# Altium PCB Sweep.PcbDoc
Units mil, origin at the board's own origin, x right, y up, seen from the top; angles counter-clockwise.
Board outline 3937.01 x 1968.5 mil, 2 copper layers (Top Layer, Bottom Layer); 25 components, 49 nets, 100 pads, 1 vias.
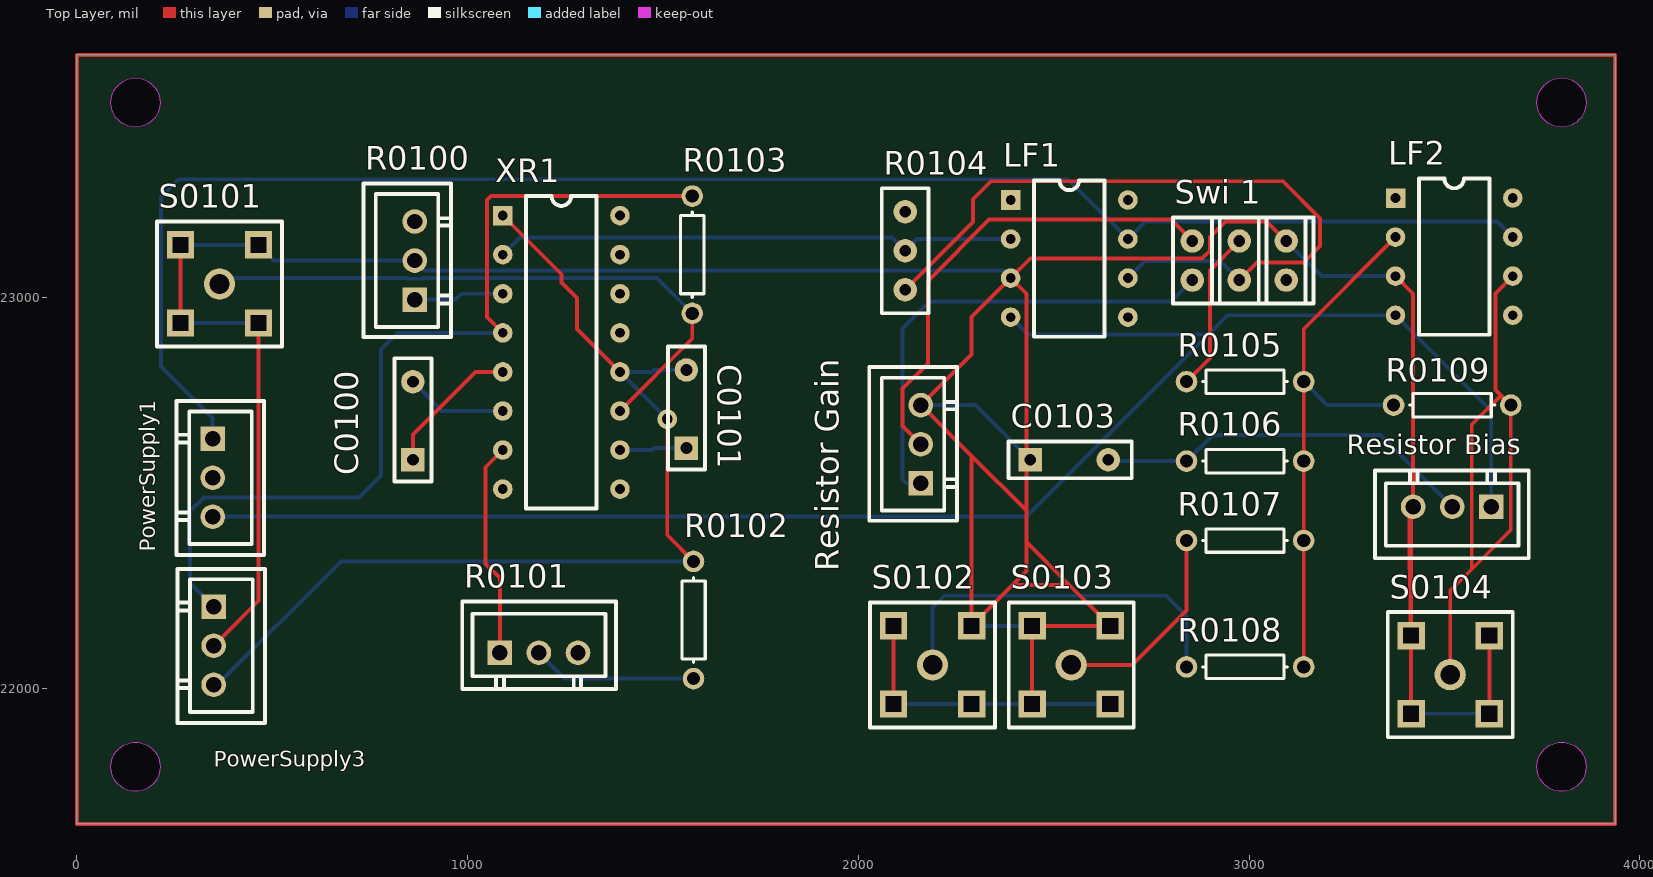
[diagram p0: Top Layer view]
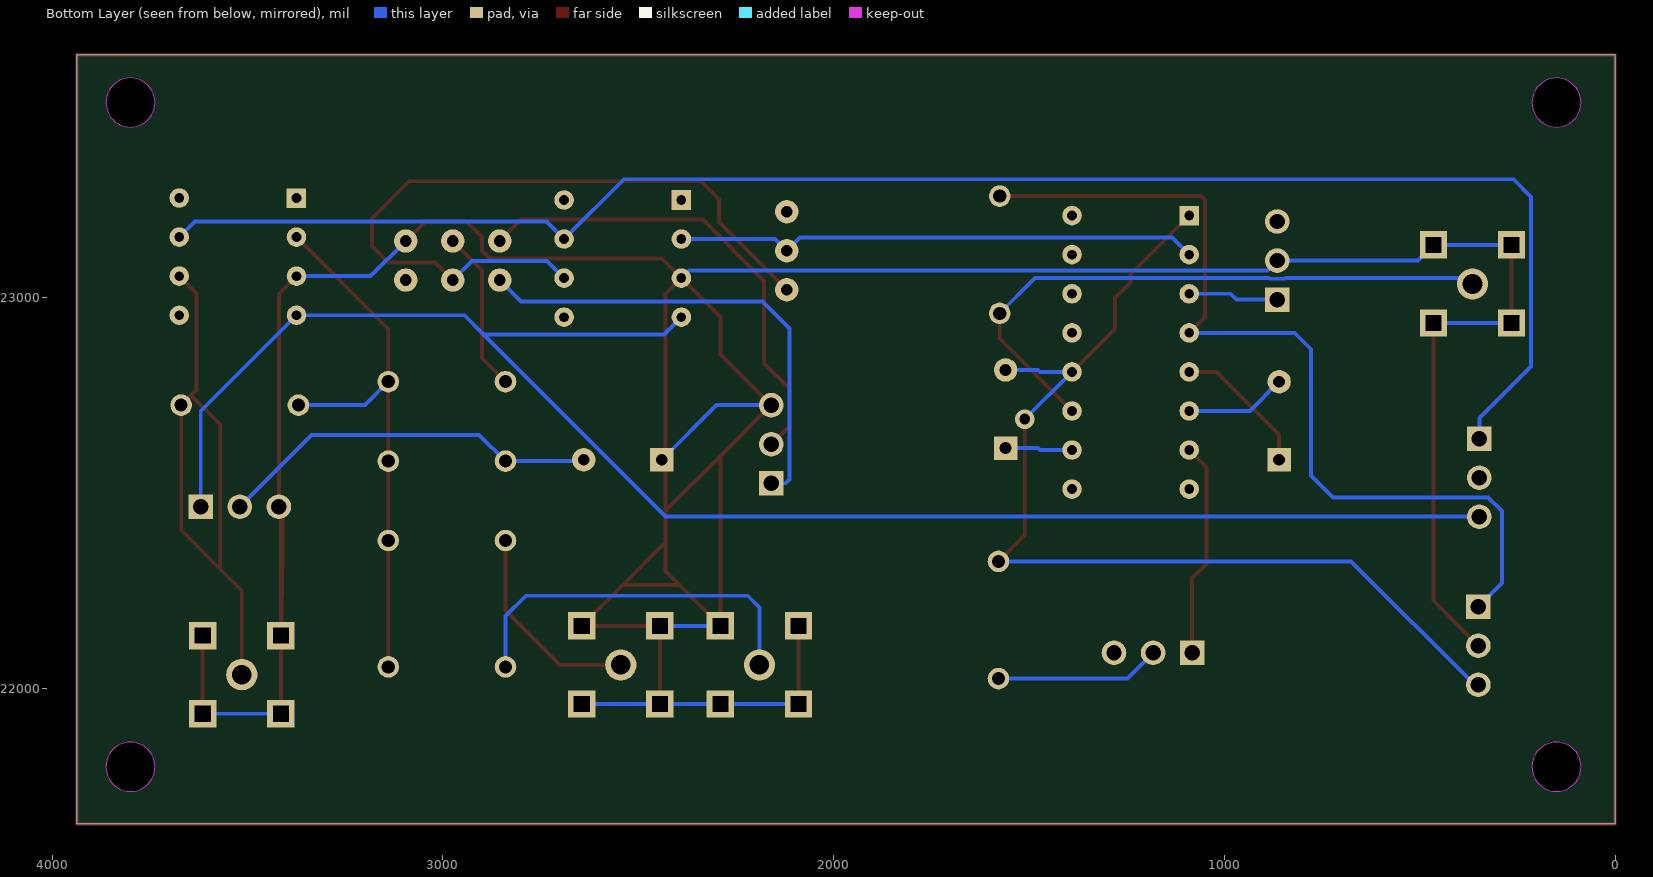
[diagram p1: Bottom Layer view, seen from below]

## Layer stack, top to bottom
Top Solder: solder mask 0.4, Solder Resist, Dk 3.5
Top Layer: signal copper 1.4
Dielectric 1: dielectric 12.6, FR-4, Dk 4.8
Bottom Layer: signal copper 1.4
Bottom Solder: solder mask 0.4, Solder Resist, Dk 3.5

## Board outline
0,21653.54 3937.01,21653.54 3937.01,23622.05 0,23622.05
cut-out: 3800,21737.01 cw(c3800,21800) 3737.01,21800 cw(c3800,21800) 3800,21862.99 cw(c3800,21800) 3862.99,21800 cw(c3800,21800)
cut-out: 3800,23437.01 cw(c3800,23500) 3737.01,23500 cw(c3800,23500) 3800,23562.99 cw(c3800,23500) 3862.99,23500 cw(c3800,23500)
cut-out: 150,23437.01 cw(c150,23500) 87.01,23500 cw(c150,23500) 150,23562.99 cw(c150,23500) 212.99,23500 cw(c150,23500)
cut-out: 150,21737.01 cw(c150,21800) 87.01,21800 cw(c150,21800) 150,21862.99 cw(c150,21800) 212.99,21800 cw(c150,21800)

## Design rules (kind name [scope] priority, off if disabled: settings)
Clearance [All] p1: gap=10 ignorepadtopadclearanceinfootprint=FALSE
PolygonConnect [All] p1: thpad.connectstyle=Relief thpad.reliefconductorwidth=10 thpad.reliefentries=4 thpad.polygonreliefangle="90 Angle" thpad.airgapwidth=10 smdpad.connectstyle=Direct smdpad.reliefconductorwidth=10 smdpad.reliefentries=4 smdpad.polygonreliefangle="90 Angle" smdpad.airgapwidth=10 via.connectstyle=Direct via.reliefconductorwidth=10 via.reliefentries=4 via.polygonreliefangle="90 Angle" via.airgapwidth=10
RoutingVias [All] p1: holewidth=28 width=50 viastyle="Through Hole" minholewidth=28 minwidth=50 maxholewidth=28 maxwidth=50
SolderMaskExpansion [All] p1: expansion=4
Width [All] p1: maxlimit=10 minlimit=10 preferedwidth=10
30 further rules are at their usual default settings.

## Components (designator, comment, footprint, x,y, rotation, side; value= is the part's Value field where it differs from the comment)
C0100 "1uF" Capacitor 860,22585.67 r90 top
C0101 "1uF" Capacitor 1560,22615.67 r90 top
C0103 "1uF" Capacitor 2440,22585.67 r0 top
LF1 "LF356N" DIP8 2390,23250.67 r0 top
LF2 "LF356N" DIP8 3375,23255.67 r0 top
PowerSupply1 "J-3" J3 347.51,22639.82 r270 top
PowerSupply3 "J-3" J3 350.01,22210 r270 top
R0100 "1K" J3 864.99,22995.67 r90 top
R0101 "1K" J3 1082.48,22091.62 r0 top
R0102 "Res1" AXIAL-0.3 1578.31,22175.67 r90 top value=1K
R0103 "Res1" AXIAL-0.3 1575,23110.67 r90 top value=10k
R0104 "1K" "Res Adj 2" 2120,23020.67 r90 top
R0105 "Res1" AXIAL-0.3 2990,22785.67 r0 top value=10K
R0106 "Res1" AXIAL-0.3 2990,22582.34 r0 top value=10K
R0107 "Res1" AXIAL-0.3 2990,22379 r0 top value=10K
R0108 "Res1" AXIAL-0.3 2990,22055.67 r0 top value=10K
R0109 "Res1" AXIAL-0.3 3520,22725.67 r0 top value=10K
"Resistor Bias" "J-3" J3 3620,22465.67 r180 top
"Resistor Gain" "J-3" J3 2160,22525.67 r90 top
S0101 "Square Wave Out" SMA-S 265,23135.67 r0 top
S0102 "Error Signal" SMA-S 2090,22160.67 r0 top
S0103 "Mod in" SMA-S 2445,22160.67 r0 top
S0104 "Current / PZT Out" SMA-S 3415,22135.67 r0 top
"Swi 1" "Switch 2x2" "Swi 2x2" 2855,23045.67 r90 top
XR1 "XR-2206" DIP16 1090,23210.67 r0 top

## Footprints (in the part's own frame and the unit in brackets; to place one, negate y for a bottom-side part, rotate by r counter-clockwise, add the part's x,y. Pads: shape width x height; smd on the part's side, far side on the other; paste and mask are expansions set on the pad)
AXIAL-0.3 [mm] "Axial Device, Thru-Hole; 2 Leads; 0.3 in Pin Spacing"
  round 1.4 hole 0.85: 1(-3.81,0) 2(3.81,0)
  silkscreen extent -2.77,-0.76 2.77,0.76
Capacitor [mil]
  rect 60x60 hole 30: 1(0,0)
  round 60 hole 30: 2(200,0)
  silkscreen extent -55,-47 260,47
DIP8 [mil]
  rect 50x50 hole 25: 1(0,0)
  round 50 hole 25: 2(0,-100) 3(0,-200) 4(0,-300) 5(300,-300) 6(300,-200) 7(300,-100) 8(300,0)
  silkscreen extent 60,-350 240,50
DIP16 [mil]
  rect 50x50 hole 25: 1(0,0)
  round 50 hole 25: 2(0,-100) 3(0,-200) 4(0,-300) 5(0,-400) 6(0,-500) 7(0,-600) 8(0,-700) 9(300,-700) 10(300,-600) 11(300,-500) 12(300,-400) 13(300,-300) 14(300,-200) 15(300,-100) 16(300,0)
  silkscreen extent 60,-750 240,50
J3 [mm] "+-G"
  rect 1.6x1.6 hole 1: 1(0,0)
  round 1.6 hole 1: 2(2.54,0) 3(5.08,0)
  silkscreen extent -2.44,-2.35 7.56,3.35
"Res Adj 2" [mil]
  round 60 hole 30: 1(0,0) 1(0,0) 2(100,0) 3(200,0)
  silkscreen extent -60,-60 260,60
SMA-S [mil]
  round 80 hole 50: 1(100,-100)
  rect 70x70 hole 40 square: 2(0,-200) 2(0,0) 2(200,-200) 2(200,0)
  silkscreen extent -60,-260 260,60
"Swi 2x2" [mil]
  round 60 hole 30: 1(0,-120) 2(100,-120) 3(0,0) 4(100,0) 5(0,-240) 6(100,-240)
  silkscreen extent -60,-310 160,50

## Part data
C0100 C0101 C0103: library part Cap
R0100 R0101 R0104: library part "Res Adj"
R0102 R0103 R0105 R0106 R0107 R0108 R0109: "Resistor", LatestRevisionDate=17-Jul-2002, LatestRevisionNote="Re-released for DXP Platform.", PackageDescription="Axial Device, Thru-Hole; 2 Leads; 0.3 in Pin Spacing", PackageReference=AXIAL-0.3, Published=8-Jun-2000, Publisher="Altium Limited"
S0101 S0102 S0103 S0104: library part SMA-S

## Via types
v1: diameter 50, hole 28, Top Layer to Bottom Layer, 1 vias

## Nets (pads, with @x,y where several pads share a name; then routed paths per layer and width w, separated by ;. In a path a pad name is that pad's centre, name@x,y a point inside that pad or via, vN(x,y) a via of type N, cw(c..) or ccw(c..) an arc to the next point about the centre after c; other vN are vias at no path point)
GND: PowerSupply1.2
NetC4_1: 
NetC4_2: 
NetC5_1: 
NetC5_2: 
NetC0100_1: C0100.1 XR1.5 | length 361.3
  Top Layer w10: C0100.1 860,22650.67 1020,22810.67 XR1.5
NetC0100_2: C0100.2 XR1.6 | length 261.1
  Bottom Layer w10: C0100.2 935,22710.67 XR1.6
NetC0101_1: C0101.1 XR1.10 | length 172.1
  Bottom Layer w10: XR1.10 1472,22610.67 1477,22615.67 C0101.1
NetC0101_2: C0101.2 PowerSupply3.3 R0102.2 XR1.1 XR1.12 | length 2615.5
  Top Layer w10: XR1.1 1240,23060.67 1240,23040 1280,23000 1280,22920.67 XR1.12 ; v1(1511,22689.67) 1511,22392.98 R0102.2
  Bottom Layer w10: PowerSupply3.3@355,22005 675.67,22325.67 R0102.2 ; v1(1511,22689.67) XR1.12 1472,22810.67 1477,22815.67 C0101.2
NetC0103_1: "Resistor Bias.3" "Resistor Gain.3" "Swi 1.6" C0103.1 LF1.3 LF2.3 PowerSupply3.2 R0100.2 S0101.2 S0102.2 S0103.2 S0104.2 | length 10688.3
  Top Layer w10: S0101.2@265,22935.67 S0101.2@265,23135.67 ; 375,22135 465,22225 S0101.2@465,22935.67 ; S0102.2@2090,21960.67 S0102.2@2090,22160.67 ; S0103.2@2445,21960.67 2445,22160.67 2645,22160.67 2540,22265.67 ; 3095,23145.67 3045,23195.67 2940,23195.67 2900,23155.67 2900,23120.67 2880,23100.67 2440,23100.67 LF1.3 ; LF2.3 3420,23010.67 3420,22465.68 3415,22460.68 ; S0104.2@3415,21935.67 S0104.2@3415,22135.67 ; S0104.2@3615,21935.67 S0104.2@3615,22135.67 ; 2290,22595.68 2430,22455.68 ; 2290,22595.68 2160.01,22725.67 2290,22855.66 2290,22950.67 LF1.3 ; 2290,22595.68 2290,22160.67 2395,22265.67 ; LF1.3 2430,23010.67 2430,22455.68 ; 2395,22265.67 2430,22300.67 2430,22375.67 ; 2395,22265.67 2540,22265.67 ; 2430,22375.67 2430,22455.68 ; 2430,22375.67 2540,22265.67 ; S0104.2@3415,22135.67 3415,22460.68 ; S0104.2@3415,22135.67 3410,22338.67 3410,22455.68 3415,22460.68
  Bottom Layer w10: S0101.2@265,22935.67 S0101.2@465,22935.67 ; S0101.2@265,23135.67 465,23135.67 505,23095.67 R0100.2 890,23070.67 2370,23070.67 LF1.3 ; S0102.2@2090,21960.67 2290,21960.67 2445,21960.67 S0103.2@2645,21960.67 ; 2160.01,22725.67 2300,22725.67 C0103.1 ; S0102.2@2290,22160.67 S0103.2@2445,22160.67 ; 3095,23145.67 3185,23055.67 LF2.3 ; S0104.2@3415,21935.67 S0104.2@3615,21935.67
NetC0103_2: "Resistor Bias.2" C0103.2 R0106.1 | length 985.5
  Bottom Layer w10: C0103.2 2643.33,22582.34 R0106.1 2907.33,22649.67 3336.01,22649.67 3520,22465.68
NetC0201_1: 
NetC0202_2: 
NetC0203_1: 
NetLF1_2: LF1.2 R0104.2 XR1.2 | length 1344.7
  Bottom Layer w10: XR1.2 1134,23154.67 2086,23154.67 R0104.2 2150,23150.67 LF1.2
NetLF1_4: "Resistor Bias.1" LF1.4 LF2.4 PowerSupply1.3 | length 4356.9
  Bottom Layer w10: PowerSupply1.3 348.35,22440.67 2430,22440.67 2896,22906.67 ; LF1.4 2434,22906.67 2896,22906.67 ; 3620,22465.67 3620,22710.67 LF2.4 2945,22955.67 2896,22906.67
NetLF1_6: "Swi 1.1" LF1.6 R0104.1 | length 1888
  Top Layer w10: R0104.1@2120,23020.67 2294,23194.67 2294,23252.67 2340,23298.67 3087,23298.67 3182,23203.67 3182,23132.67 3140,23090.67 3020,23090.67 2975,23045.67
  Bottom Layer w10: LF1.6 2734,23094.67 2926,23094.67 2975,23045.67
NetLF1_7: LF1.7 LF2.7 PowerSupply1.1 | length 4251
  Bottom Layer w10: PowerSupply1.1 347.51,22692.16 215,22824.67 215,23258.67 260,23303.67 2537,23303.67 LF1.7 2735,23195.67 3635,23195.67 LF2.7
NetLF2_2: LF2.2 R0105.2 R0106.2 R0107.2 R0108.2 R0109.1 | length 1452.2
  Top Layer w10: R0108.2 R0107.2 R0106.2 R0105.2 3140,22920.67 LF2.2
  Bottom Layer w10: R0105.2 3200,22725.67 R0109.1
NetLF2_6: LF2.6 R0109.2 S0104.1 | length 1594.6
  Top Layer w10: S0104.1 3515,22250.67 3570,22305.67 ; LF2.6 3631,23011.67 3631,22764.67 3645,22750.67 ; 3570,22305.67 3670,22405.67 R0109.2 3645,22750.67 ; 3570,22305.67 3570,22675.67 3645,22750.67
NetOP1_1: 
NetOP1_2: 
NetOP1_3: 
NetOP1_8: 
NetOP1_9: 
NetOP1_10: 
NetOP1_13: 
NetOP2_2: 
NetOP2_4: 
NetOP2_6: 
NetOP2_7: 
NetPowerSupply3_1: PowerSupply3.1 R0103.2 XR1.4 | length 2318
  Top Layer w10: XR1.4 1050,22950.67 1050,23250.67 1060,23260.67 R0103.2
  Bottom Layer w10: PowerSupply3.1@345,22235 325,22235 290,22270 290,22454.67 325,22489.67 722,22489.67 778,22545.67 778,22868.67 820,22910.67 XR1.4
NetR0100_1: R0100.1 XR1.3 | length 231.2
  Bottom Layer w10: R0100.1 969,22995.67 984,23010.67 XR1.3
NetR0101_1: R0101.1 XR1.7 | length 552.4
  Top Layer w10: R0101.1 1082.48,22282.67 1046,22319.15 1046,22566.67 XR1.7
NetR0101_2: R0101.2 R0102.1 | length 423.1
  Bottom Layer w10: R0101.2 1248.42,22025.67 R0102.1
NetR0103_1: R0103.1 S0101.1 XR1.11 | length 1581.4
  Top Layer w10: XR1.11 1575,22895.67 R0103.1
  Bottom Layer w10: S0101.1 380,23050.67 844.24,23050.67 845.74,23049.17 884.26,23049.17 885.76,23050.67 1485,23050.67 R0103.1
NetR0105_1: "Swi 1.2" R0105.1 | length 415.9
  Top Layer w10: R0105.1 2900,22845.67 2900,23070.67 2975,23145.67
NetR0107_1: R0107.1 S0103.1 | length 531.9
  Top Layer w10: S0103.1 2701,22060.67 2840,22199.67 R0107.1
NetR0108_1: R0108.1 S0102.1 | length 961
  Bottom Layer w10: S0102.1 2190,22207.67 2220,22237.67 2788,22237.67 2840,22185.67 R0108.1
NetR0204_1: 
NetR0314_1: 
NetR0314_2: 
NetR0315_1: 
NetR0316_1: 
NetR0317_1: 
NetR0420_1: 
"NetResistor Gain_1": "Resistor Gain.1" "Swi 1.3" | length 1230.5
  Bottom Layer w10: 2160,22525.67 2123,22525.67 2113,22535.67 2113,22921.67 2182,22990.67 2800,22990.67 2855,23045.67
"NetResistor Gain_2": "Resistor Gain.2" "Swi 1.4" | length 1229.2
  Top Layer w10: 2160.01,22625.67 2113,22672.68 2113,22767.67 2178,22832.67 2178,23043.67 2335,23200.67 2800,23200.67 2855,23145.67
"NetResistor PZT_2": 
pads on no net: "Swi 1.5" LF1.1 LF1.5 LF1.8 LF2.1 LF2.5 LF2.8 R0100.3 R0101.3 R0104.3 XR1.8 XR1.9 XR1.13 XR1.14 XR1.15 XR1.16
copper on no net: | length 11811
  Top Layer w10: 0,21653.54 3937.01,21653.54 3937.01,23622.05 0,23622.05 0,21653.54

## Silkscreen, mask and mechanical layers (free items; w line width, h text height)
Drill Drawing:
  lines w10: 2060,7005 2100,7045 ; 6960,5000 7020,4940
  text "Sweep Frequency  V1. Zuo Ying" at 1090,23430 h60